# EAGLE board DIPESH (1) (EAGLE 9.6.2)
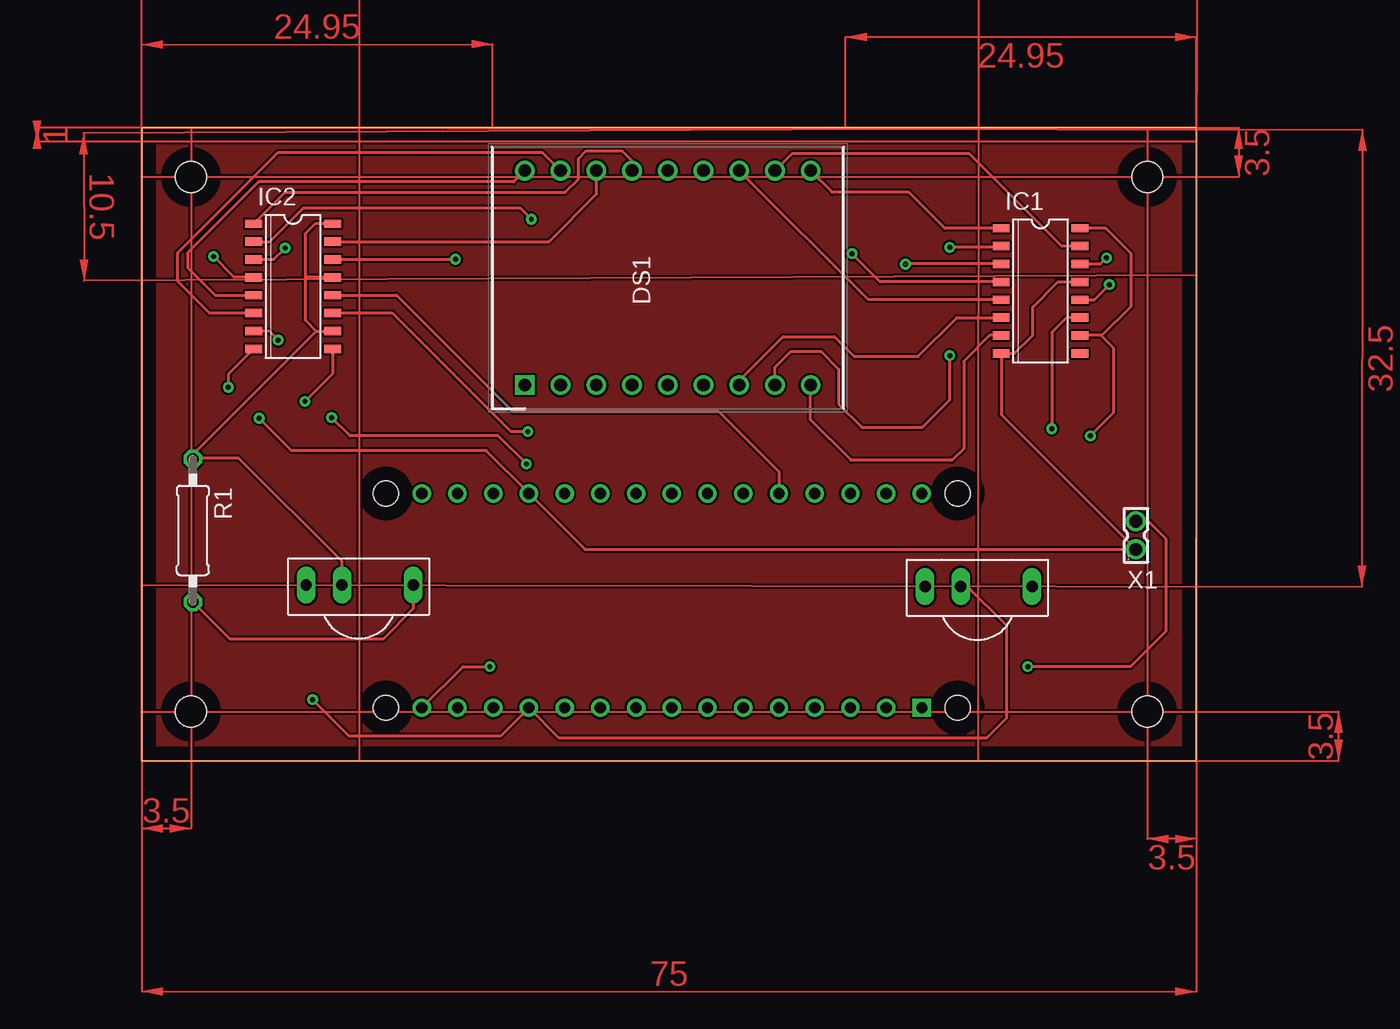
[diagram p0: board, top side]
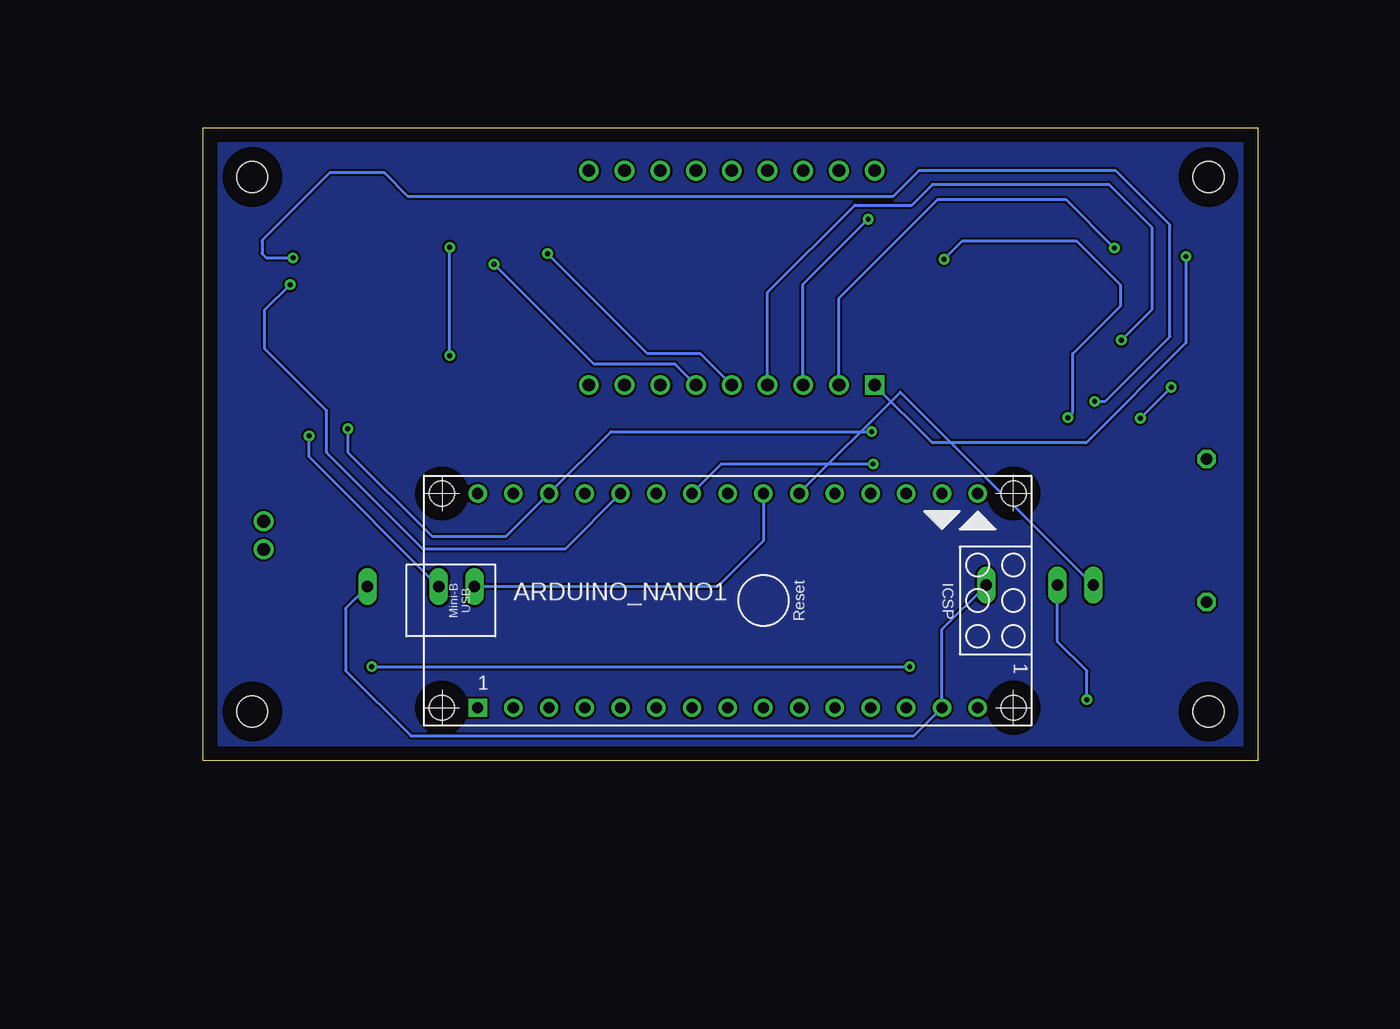
[diagram p1: board, bottom side, seen from below]

Size 75 x 45.01 mm. Coordinates in mm from the lower left corner, seen from the top.
Outline: 0,0.01 75,0 75,45.01 0,45.01 0,0.01
Copper layers (1*16): Top 0.035mm / dielectric 1.5mm / Bottom 0.035mm
Design rules "default": minimum track width 6mil, minimum drill 0.35mm, track to track 6mil, track to pad 6mil, pad to pad 6mil, via to via 6mil, smd to smd 6mil, copper to edge 40mil, drill to drill 6mil, minimum pad ring 10mil, minimum via ring 8mil, stop-mask expansion 4mil, vias tented up to drill 0mil, thermal gap 10mil
Holes 2.2 mm at 3.5,3.51 3.5,41.51 71.5,41.51 71.5,3.51

## Footprints (pad centres in the part's own frame; a part is rotated, then mirrored left to right if it is on the bottom)
ARDUINO_NANO = drill 0.8 square: 1 -20.32,-7.62 | drill 0.8: 2 -17.78,-7.62; 3 -15.24,-7.62; 4 -12.7,-7.62; 5 -10.16,-7.62; 6 -7.62,-7.62; 7 -5.08,-7.62; 8 -2.54,-7.62; 9 0,-7.62; 10 2.54,-7.62; 11 5.08,-7.62; 12 7.62,-7.62; 13 10.16,-7.62; 14 12.7,-7.62; 15 15.24,-7.62; 16 15.24,7.62; 17 12.7,7.62; 18 10.16,7.62; 19 7.62,7.62; 20 5.08,7.62; 21 2.54,7.62; 22 0,7.62; 23 -2.54,7.62; 24 -5.08,7.62; 25 -7.62,7.62; 26 -10.16,7.62; 27 -12.7,7.62; 28 -15.24,7.62; 29 -17.78,7.62; 30 -20.32,7.62 | hole 1.778: -22.86,-7.62; -22.86,7.62; 17.78,7.62; 17.78,-7.62
DIPS1524W50P254L2500H800Q18N = drill 0.9 pad 1.35 square: 1 0,0 | drill 0.9 pad 1.35: 2 0,-2.54; 3 0,-5.08; 4 0,-7.62; 5 0,-10.16; 6 0,-12.7; 7 0,-15.24; 8 0,-17.78; 9 0,-20.32; 10 15.24,-20.32; 11 15.24,-17.78; 12 15.24,-15.24; 13 15.24,-12.7; 14 15.24,-10.16; 15 15.24,-7.62; 16 15.24,-5.08; 17 15.24,-2.54; 18 15.24,0
SO16 = smd 0.6 x 1.2: 1 -4.445,-2.8; 2 -3.175,-2.8; 3 -1.905,-2.8; 4 -0.635,-2.8; 5 0.635,-2.8; 6 1.905,-2.8; 7 3.175,-2.8; 8 4.445,-2.8; 9 4.445,2.8; 10 3.175,2.8; 11 1.905,2.8; 12 0.635,2.8; 13 -0.635,2.8; 14 -1.905,2.8; 15 -3.175,2.8; 16 -4.445,2.8
0207/10 = drill 0.813 octagon: 1 -5.08,0; 2 5.08,0
TSOP17XX = drill 0.813 long: GND -3.81,0; OUT 3.81,0; V+ -1.27,0
332-02 = drill 0.9 pad 1.27: 1 0,-1; 2 0,1

## Placement (x,y rotation side)
ARDUINO_NANO1  [ARDUINO_NANO]  35.15,11.4 0 bottom
DS1  HDSP-523A  [DIPS1524W50P254L2500H800Q18N]  27.24,26.72 90 top
IC1  74HC595  [SO16]  63.91,33.42 270 top
IC2  74HC595  [SO16]  10.76,33.74 270 top
R1  [0207/10]  3.63,16.39 270 top
TSOP1  TSOP1730  [TSOP17XX]  15.5,12.5 0 top
TSOP2  TSOP1730  [TSOP17XX]  59.5,12.4 0 top
X1  332-02  [332-02]  70.69,16.04 0 top

## Library data of the parts
ARDUINO_NANO1 = ArduinoNanoV30
DS1 = HDSP-523A; DESCRIPTION: LED Displays & Accessories Red 643nm 0.56in 7 Segment; HEIGHT: 8mm; MANUFACTURER_NAME: Avago Technologies; MANUFACTURER_PART_NUMBER: HDSP-523A; MOUSER_PART_NUMBER: 630-HDSP-523A; MOUSER_PRICE-STOCK: https://www.mouser.co.uk/ProductDetail/Broadcom-Avago/HDSP-523A?qs=pQfy5%252BKCabJDIZsniRXu3w%3D%3D
IC1 IC2 = 74HC595; AVAILABILITY: In Stock; DESCRIPTION: Shift Register Single 8-Bit Serial to Serial/Parallel 16-Pin SSOP T/R; MF: Nexperia; MP: 74HC595; PACKAGE: None; PRICE: None; PURCHASE-URL: https://pricing.snapeda.com/search/part/74HC595/?ref=eda
R1 = rcl; SPICEPREFIX: R
TSOP1 TSOP2 = tsop
X1 = con-garry

## Nets
N$1: ARDUINO_NANO1.19 IC1.8 IC1.13 IC2.8 X1.1
N$2: ARDUINO_NANO1.21 TSOP1.GND
N$3: ARDUINO_NANO1.22 TSOP2.GND
N$4: IC1.14 IC2.9
N$5: ARDUINO_NANO1.15 X1.2
N$6: ARDUINO_NANO1.12 IC1.10 IC1.16 IC2.10 IC2.13 IC2.16 R1.1 TSOP1.V+ TSOP2.V+
N$7: ARDUINO_NANO1.14 R1.2 TSOP1.OUT TSOP2.OUT
N$8: DS1.11 IC1.15
N$9: ARDUINO_NANO1.24 IC2.14
N$10: DS1.16 IC2.15
N$11: ARDUINO_NANO1.26 IC1.12 IC2.12
N$12: ARDUINO_NANO1.28 IC1.11 IC2.11
N$13: DS1.15 IC2.1
N$14: DS1.5 IC1.4
N$15: DS1.10 IC1.1
N$16: DS1.8 IC1.2
N$17: DS1.3 IC2.2
N$18: DS1.2 IC2.3
N$19: DS1.6 IC1.3
N$20: DS1.1 IC2.4
N$21: DS1.18 IC2.5
N$22: DS1.12 IC1.5
N$23: DS1.7 IC1.6
N$24: DS1.17 IC2.6
N$25: DS1.9 IC1.7
N$26: DS1.4 IC2.7

## Tracks (layer width: path | path; a pad name or v marks a point on that pad's centre or on a via)
5V
  pour Top: 0,45.01 0,0.01 75,0.01 75,45.01
GND
  pour Bottom: 0,45.01 0,0.01 75,0.01 75,45.01
N$1  (via drill 0.35)
  Top 0.2: v8.35,24.36 10.65,22.06 24.49,22.06 ARDUINO_NANO1.19 31.51,15.04 X1.1 61.11,24.62 IC1.8 62.06,28.98 63.35,30.26 63.35,32.26 65.14,34.05 IC1.13 | IC2.8 6.15,27.49 v6.15,26.56
  Bottom 0.2: v8.35,24.36 v6.15,26.56
N$2
  Bottom 0.2: TSOP1.GND 25.41,26.22 ARDUINO_NANO1.21
N$3
  Bottom 0.2: ARDUINO_NANO1.22 35.15,15.66 38.41,12.4 TSOP2.GND
N$4  (via drill 0.35)
  Top 0.2: IC2.9 13.56,27.52 v11.6,25.56 | IC1.14 68.17,35.32 v68.6,35.76
  Bottom 0.2: v11.6,25.56 10.85,25.56 6.25,30.16 6.25,38.11 10.1,41.96 24.1,41.96 25.95,40.11 60.4,40.11 62.1,41.81 66,41.81 70.8,37.01 70.8,36.06 70.5,35.76 v68.6,35.76 68.5,35.76
N$5  (via drill 0.35)
  Top 0.2: X1.2 71.57,17.04 72.8,15.81 72.8,9.21 70.3,6.71 v63,6.71 | ARDUINO_NANO1.15 22.84,6.71 v24.75,6.71
  Bottom 0.2: v63,6.71 v24.75,6.71
N$6  (via drill 0.35)
  Top 0.2: IC2.16 12.32,38.18 11.6,37.46 11.6,34.26 | 12.4,30.56 11.6,31.36 11.6,34.26 | 12.4,30.56 IC2.10 | IC2.13 11.71,34.38 11.6,34.26 | 12.4,30.56 3.9,22.06 3.85,22.06 3.63,21.84 3.63,21.51 | 3.63,21.51 R1.1 | TSOP1.V+ 14.23,14.18 6.9,21.51 3.63,21.51 | TSOP2.V+ 58.71,12.4 61.5,9.61 61.5,3.06 60.1,1.66 29.65,1.66 ARDUINO_NANO1.12 25.51,1.76 14.75,1.76 v12.15,4.36 | IC1.10 68.22,30.25 68.25,30.21 | 68.25,30.21 69.1,29.36 69.1,24.76 v67.45,23.11 67.4,23.06 | 68.25,30.21 70.35,32.31 70.35,36.06 68.55,37.86 IC1.16
  Bottom 0.2: v12.15,4.36 12.15,6.41 14.23,8.49 TSOP1.V+ | TSOP2.V+ 67.45,21.62 v67.45,23.11
N$7
  Top 0.2: TSOP1.OUT 19.31,10.82 17.15,8.66 6.28,8.66 R1.2
  Bottom 0.2: TSOP2.OUT 64.86,10.85 64.86,6.42 60.22,1.77 24.45,1.77 ARDUINO_NANO1.14 22.45,9.36 TSOP1.OUT
N$8
  Top 0.2: IC1.15 65.42,36.59 58.85,43.16 46.22,43.16 DS1.11
N$9  (via drill 0.35)
  Top 0.2: IC2.14 22.15,35.64 22.29,35.64 | 22.29,35.64 22.32,35.64 | v27.35,21.11 25.35,23.11 14.8,23.11 v13.5,24.41 | v22.3,35.66 22.29,35.64
  Bottom 0.2: ARDUINO_NANO1.24 38.14,21.11 v27.35,21.11 27.25,21.11 | v13.5,24.41 13.15,24.76 13.15,28.96 9.75,32.36 9.75,33.81 12.9,36.96 21,36.96 v22.3,35.66
N$10
  Top 0.2: IC2.15 28.95,36.91 32.35,40.31 32.35,41.93 DS1.16
N$11  (via drill 0.35)
  Top 0.2: IC1.12 67.72,32.78 v68.8,33.86 68.85,33.91 | IC2.12 18.11,33.1 26.35,24.86 41,24.86 45.31,20.55 ARDUINO_NANO1.26
  Bottom 0.2: ARDUINO_NANO1.26 49.27,15.06 59.35,15.06 66.2,21.91 66.2,24.91 70.6,29.31 70.6,32.06 v68.8,33.86
N$12  (via drill 0.35)
  Top 0.2: IC1.11 65.75,31.52 64.7,30.46 v64.7,23.61 | v27.45,23.41 26.25,23.41 17.82,31.84 IC2.11
  Bottom 0.2: v64.7,23.61 64.7,21.96 58.7,15.96 53.45,15.96 ARDUINO_NANO1.28 46,23.41 v27.45,23.41
N$13
  Top 0.2: IC2.1 10.19,40.41 30.1,40.41 31.05,41.36 31.05,42.81 31.6,43.36 34.15,43.36 34.86,42.65 DS1.15
N$14  (via drill 0.35)
  Top 0.2: IC1.4 52.51,34.05 v50.5,36.06
  Bottom 0.2: DS1.5 39.64,28.96 43.4,28.96 v50.5,36.06
N$15
  Top 0.2: DS1.10 49.11,40.41 54.55,40.41 57.09,37.86 IC1.1
N$16  (via drill 0.35)
  Top 0.2: DS1.8 45.02,27.98 46.15,29.11 48.3,29.11 49.55,27.86 49.55,25.36 51.2,23.71 55.5,23.71 57.45,25.66 v57.45,28.81 57.45,28.91 | IC1.2 61.02,36.51 v57.45,36.51
  Bottom 0.2: v57.45,28.81 v57.45,36.51 57.5,36.56
N$17  (via drill 0.35)
  Top 0.2: IC2.2 9.11,36.91 11.5,39.31 26.9,39.31 v27.7,38.51
  Bottom 0.2: DS1.3 32.32,33.89 v27.7,38.51
N$18  (via drill 0.35)
  Top 0.2: IC2.3 9.38,35.64 v10.2,36.46 10.3,36.56
  Bottom 0.2: DS1.2 29.78,32.88 22.75,39.91 13.65,39.91 v10.2,36.46
N$19  (via drill 0.35)  (1 unrouted)
  Top 0.2: IC1.3 54.31,35.32
  Bottom 0.2: DS1.6 41.43,28.21 47.2,28.21 v54.3,35.31
N$20  (via drill 0.35)
  Top 0.2: IC2.4 6.58,34.38 v5.1,35.86
  Bottom 0.2: v5.1,35.86 5.1,29.71 12.2,22.61 23.13,22.61 DS1.1
N$21
  Top 0.2: DS1.18 26.44,41.16 8.3,41.16 3.25,36.11 3.25,35.06 5.21,33.1 IC2.5
N$22
  Top 0.2: IC1.5 51.66,32.78 DS1.12
N$23
  Top 0.2: DS1.7 42.48,27.04 45.6,30.16 49.25,30.16 50.65,28.76 55.2,28.76 57.95,31.52 IC1.6
N$24
  Top 0.2: IC2.6 4.83,31.84 2.55,34.11 2.55,36.11 9.7,43.26 28.48,43.26 DS1.17
N$25
  Top 0.2: IC1.7 60.28,30.25 58.45,28.41 58.45,22.21 57.6,21.36 50.45,21.36 47.56,24.25 DS1.9
N$26  (via drill 0.35)
  Top 0.2: IC2.7 9.04,30.57 v9.7,29.91
  Bottom 0.2: DS1.4 34.86,33.3 28.65,39.51 24.6,39.51 23.1,41.01 10.6,41.01 7.5,37.91 7.5,32.11 v9.7,29.91
(copper drawn outside any net)
  shapes: Top area x12